# Altium PCB Main.PcbDoc
Units mm, origin at the board's own origin, x right, y up, seen from the top; angles counter-clockwise.
Board outline 19.3 x 33.27 mm, 2 copper layers (Top Layer, Bottom Layer); 7 components, 6 nets, 16 pads, 0 vias.
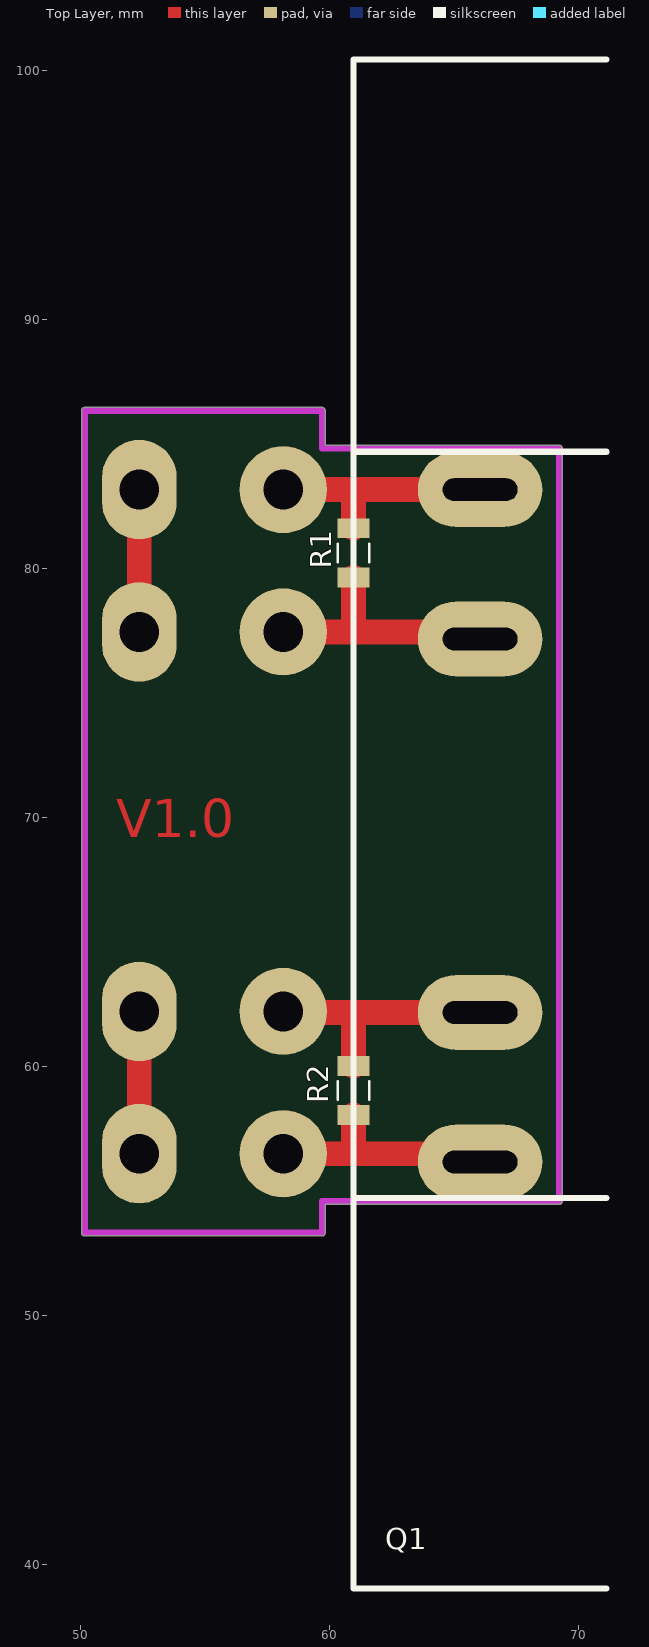
[diagram p0: Top Layer view]
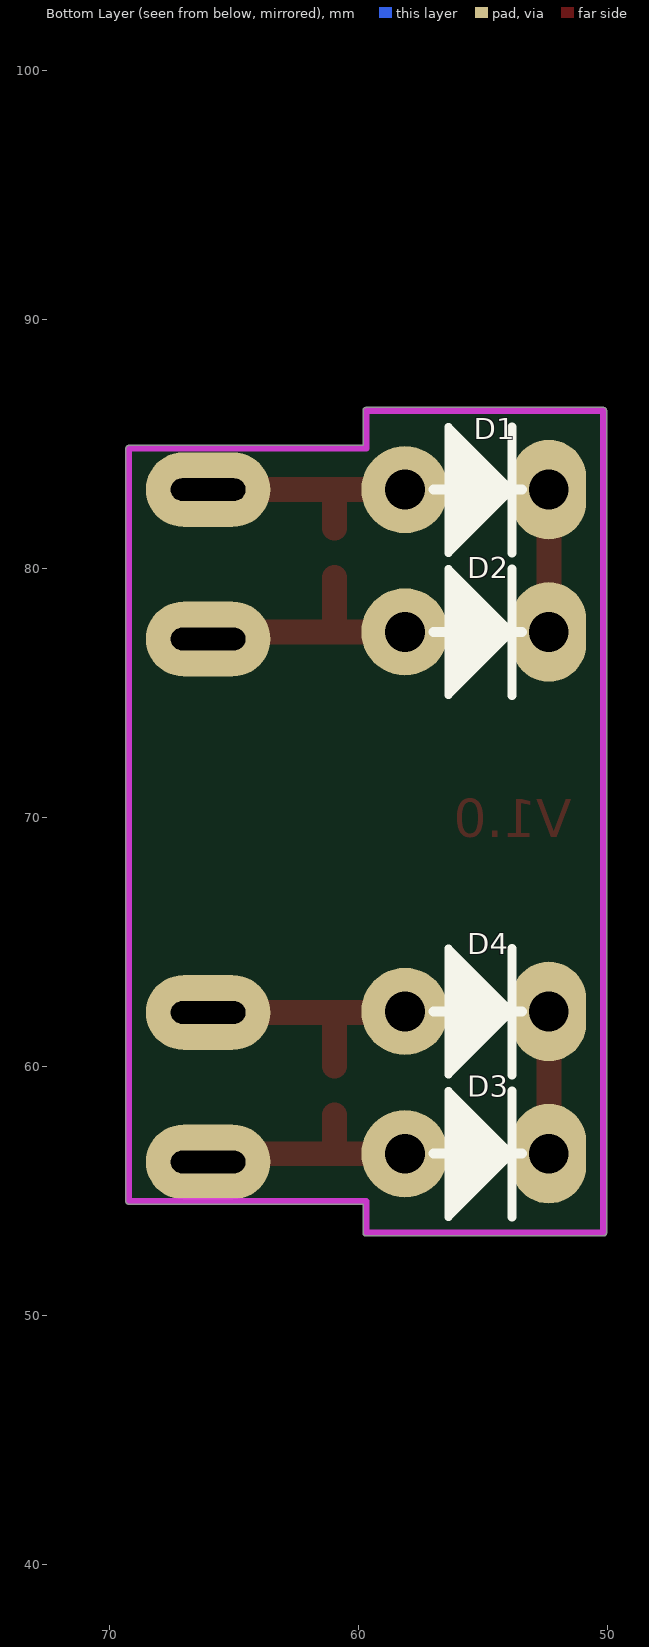
[diagram p1: Bottom Layer view, seen from below]

## Layer stack, top to bottom
Top Solder: solder mask 0.0102, Solder Resist, Dk 3.5
Top Layer: signal copper 0.0356
Dielectric 1: dielectric 0.32, FR-4, Dk 4.8
Bottom Layer: signal copper 0.0356
Bottom Solder: solder mask 0.0102, Solder Resist, Dk 3.5

## Board outline
50.165,53.213 cw(c50.165,53.34) 50.038,53.34 50.038,86.36 cw(c50.165,86.36) 50.165,86.487 59.69,86.487 cw(c59.69,86.36) 59.817,86.36 59.817,84.963 69.215,84.963 cw(c69.215,84.836) 69.342,84.836 69.342,54.61 cw(c69.215,54.61) 69.215,54.483 59.817,54.483 59.817,53.34 cw(c59.69,53.34) 59.69,53.213

## Design rules (kind name [scope] priority, off if disabled: settings)
Clearance [All] p1: gap=0.3
ComponentClearance [All] p1 off: gap=0 collisioncheckmode=3 verticalgap=0 showdistances=FALSE
Height [All] p1: minheight=0 maxheight=50 prefheight=12.7
PolygonConnect [All] p1: connectstyle=Relief reliefconductorwidth=0.254 reliefentries=4 polygonreliefangle="90 Angle" airgapwidth=0.254
RoutingVias [All] p1: holewidth=0.711 width=1.27 viastyle="Through Hole" minholewidth=0.711 minwidth=1.27 maxholewidth=0.711 maxwidth=1.27
SolderMaskExpansion [All] p1: expansion=0.102
Width [All] p1: maxlimit=0.5 minlimit=0.5 preferedwidth=0.5
28 further rules are at their usual default settings.

## Components (designator, comment, footprint, x,y, rotation, side; value= is the part's Value field where it differs from the comment)
D1 "1.5KE15A" DIODE0.7V_number 55.245,83.185 r180 bottom
D2 "1.5KE15A" DIODE0.7V_number 55.245,77.47 r180 bottom
D3 "1.5KE15A" DIODE0.7V_N 55.245,56.515 r180 bottom
D4 "1.5KE15A" DIODE0.7V_N 55.245,62.23 r180 bottom
Q1 "IGBT" IGBT_Power 66.04,83.185 r270 top
R1 "10K" 0805 60.96,80.645 r90 top
R2 "10K" 0805 60.96,59.055 r270 top

## Footprints (in the part's own frame and the unit in brackets; to place one, negate y for a bottom-side part, rotate by r counter-clockwise, add the part's x,y. Pads: shape width x height; smd on the part's side, far side on the other; paste and mask are expansions set on the pad)
0805 [mm] "Chip Resistor, Body 2.0x1.3mm, IPC Medium Density"
  rect 0.8x1.3 smd: 1(-0.991,0) 2(0.991,0)
  silkscreen extent -0.38,-0.64 0.38,0.64, body extent -1.07,-0.7 1.07,0.7, height 0.65
DIODE0.7V_N [mm] "created by: M.Hariri (designer)"
  round 3.5 hole 1.6: 1(-2.89,0)
  oval 3x4 hole 1.6: 2(2.89,0)
  silkscreen extent -1.74,-2.55 1.81,2.53
DIODE0.7V_number [mm] "created by: M.Hariri (designer)"
  round 3.5 hole 1.6: 1(-2.89,0)
  oval 3x4 hole 1.6: 2(2.89,0)
  silkscreen extent -1.74,-2.55 1.81,2.53
IGBT_Power [mm]
  oval 3x5 hole 0.9 slot 3 at 90 deg: 4(0,0) 5(6,0) 6(27,0) 7(21,0)
  silkscreen extent -17.27,-5.08 44.13,5.08

## Part data
D1 D2 D3 D4: library part "D Zener", "Zener Diode"
Q1: library part IGBT_Power, "N-Channel MOSFET"
R1 R2: library part Res1, "Resistor"

## Nets (pads, with @x,y where several pads share a name; then routed paths per layer and width w, separated by ;. In a path a pad name is that pad's centre, name@x,y a point inside that pad or via, vN(x,y) a via of type N, cw(c..) or ccw(c..) an arc to the next point about the centre after c; other vN are vias at no path point)
NetD1_1: D1.1 Q1.4 R1.2 | length 10.1
  Top Layer w1: D1.1@57.5,83.185 60.96,83.185 ; R1.2 60.96,83.185 ; Q1.4 60.96,83.185
NetD1_2: D1.2 D2.2 | length 5.7
  Top Layer w1: D2.2 D1.2
NetD2_1: D2.1 Q1.5 R1.1 | length 10.7
  Top Layer w1: D2.1@57.785,77.185 58.07,77.47 60.96,77.47 ; R1.1 60.96,77.47 ; Q1.5 65.755,77.47 60.96,77.47
NetD3_1: D3.1 Q1.6 R2.2 | length 10
  Top Layer w1: D3.1@57.83,56.185 58.16,56.515 60.96,56.515 ; R2.2 60.96,56.515 ; Q1.6 65.71,56.515 60.96,56.515
NetD3_2: D3.2 D4.2 | length 5.7
  Top Layer w1: D3.2 D4.2
NetD4_1: D4.1 Q1.7 R2.1 | length 10.6
  Top Layer w1: D4.1@57.545,62.185 60.96,62.185 ; R2.1 60.96,62.185 ; Q1.7 60.96,62.185

## Keep-outs
Keep-Out Layer:
  lines w0.254: 50.165,53.34 59.69,53.34 59.69,54.61 69.215,54.61 69.215,84.836 59.69,84.836 59.69,86.36 50.165,86.36 50.165,53.34

## Other copper
Top Layer:
  text "V1.0" at 51.435,69.215 h1.52